# Altium PCB Hydro_Node_PCB.PcbDoc
Units mm, origin at the board's own origin, x right, y up, seen from the top; angles counter-clockwise.
Board outline 80 x 60 mm, 2 copper layers (Top Layer, Bottom Layer); 38 components, 32 nets, 147 pads, 33 vias.
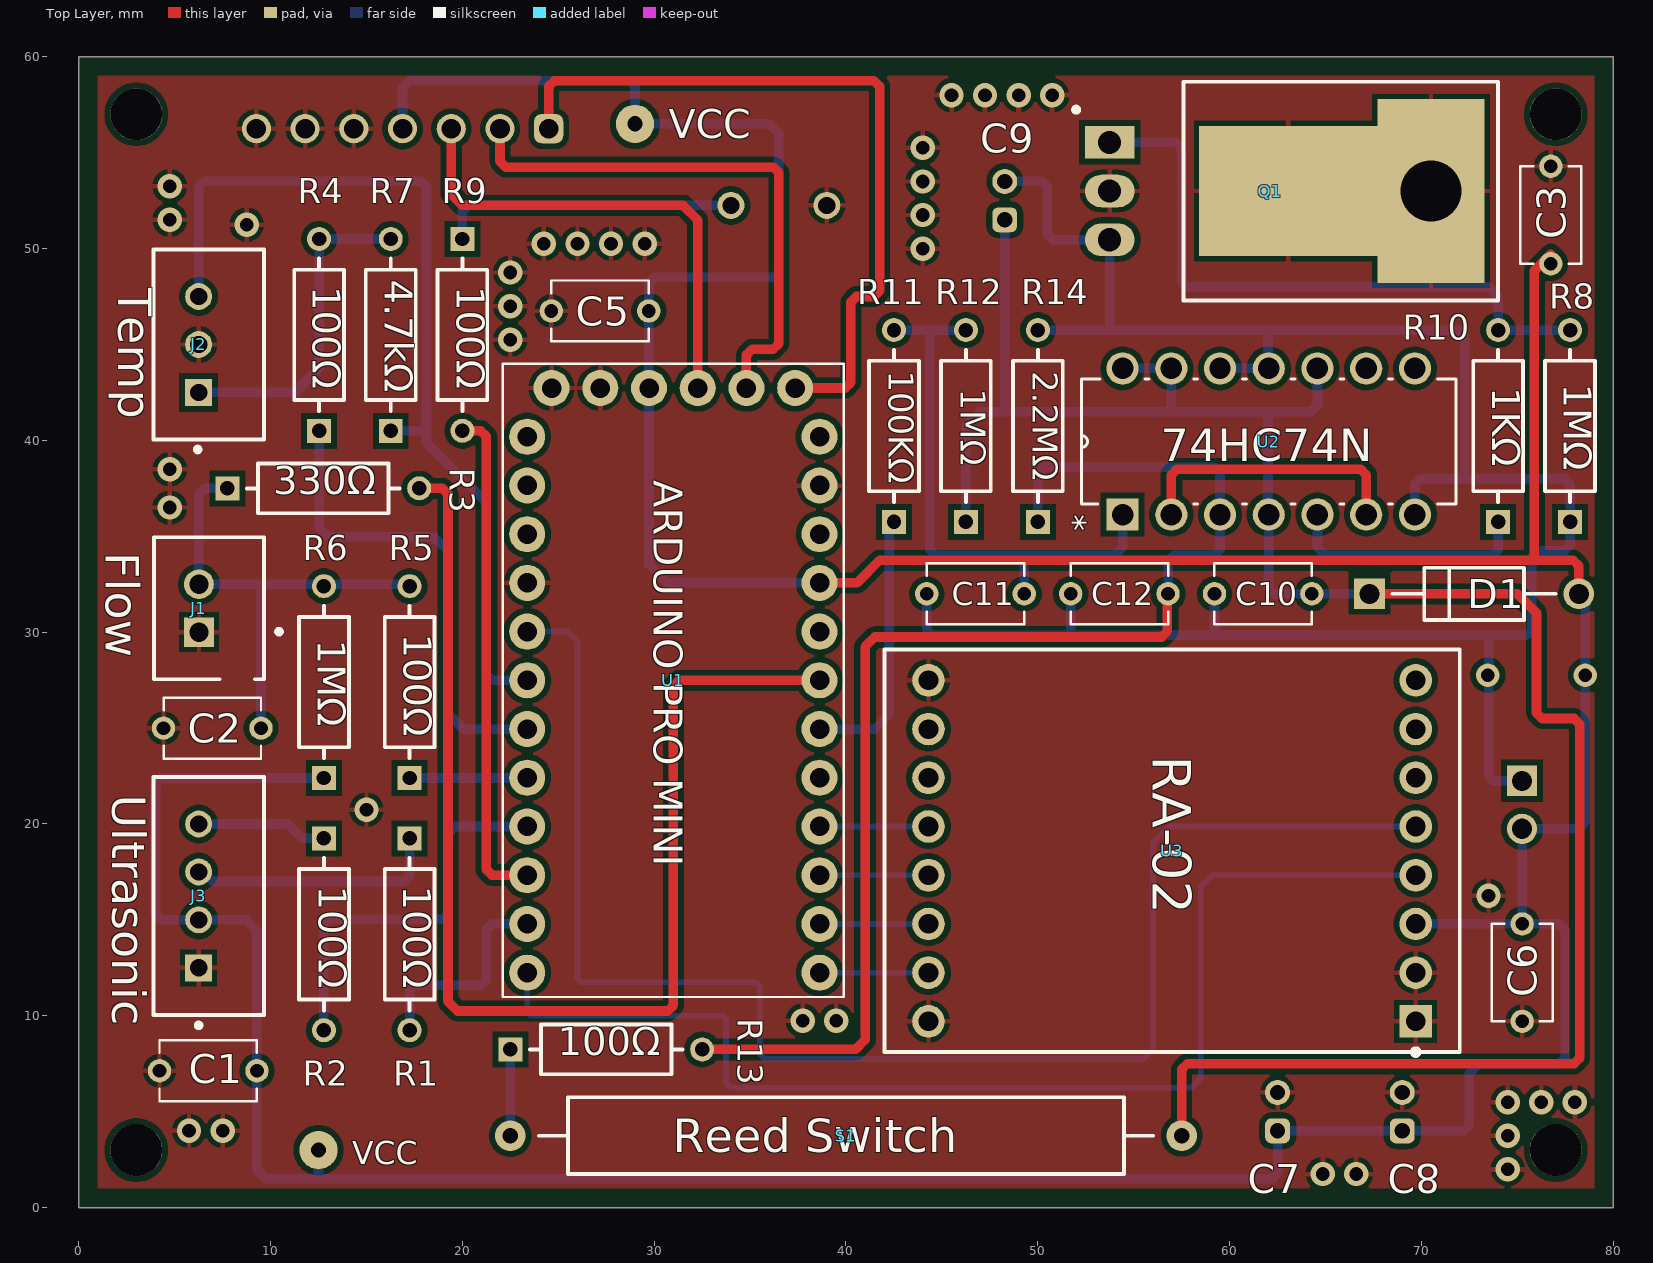
[diagram p0: Top Layer view]
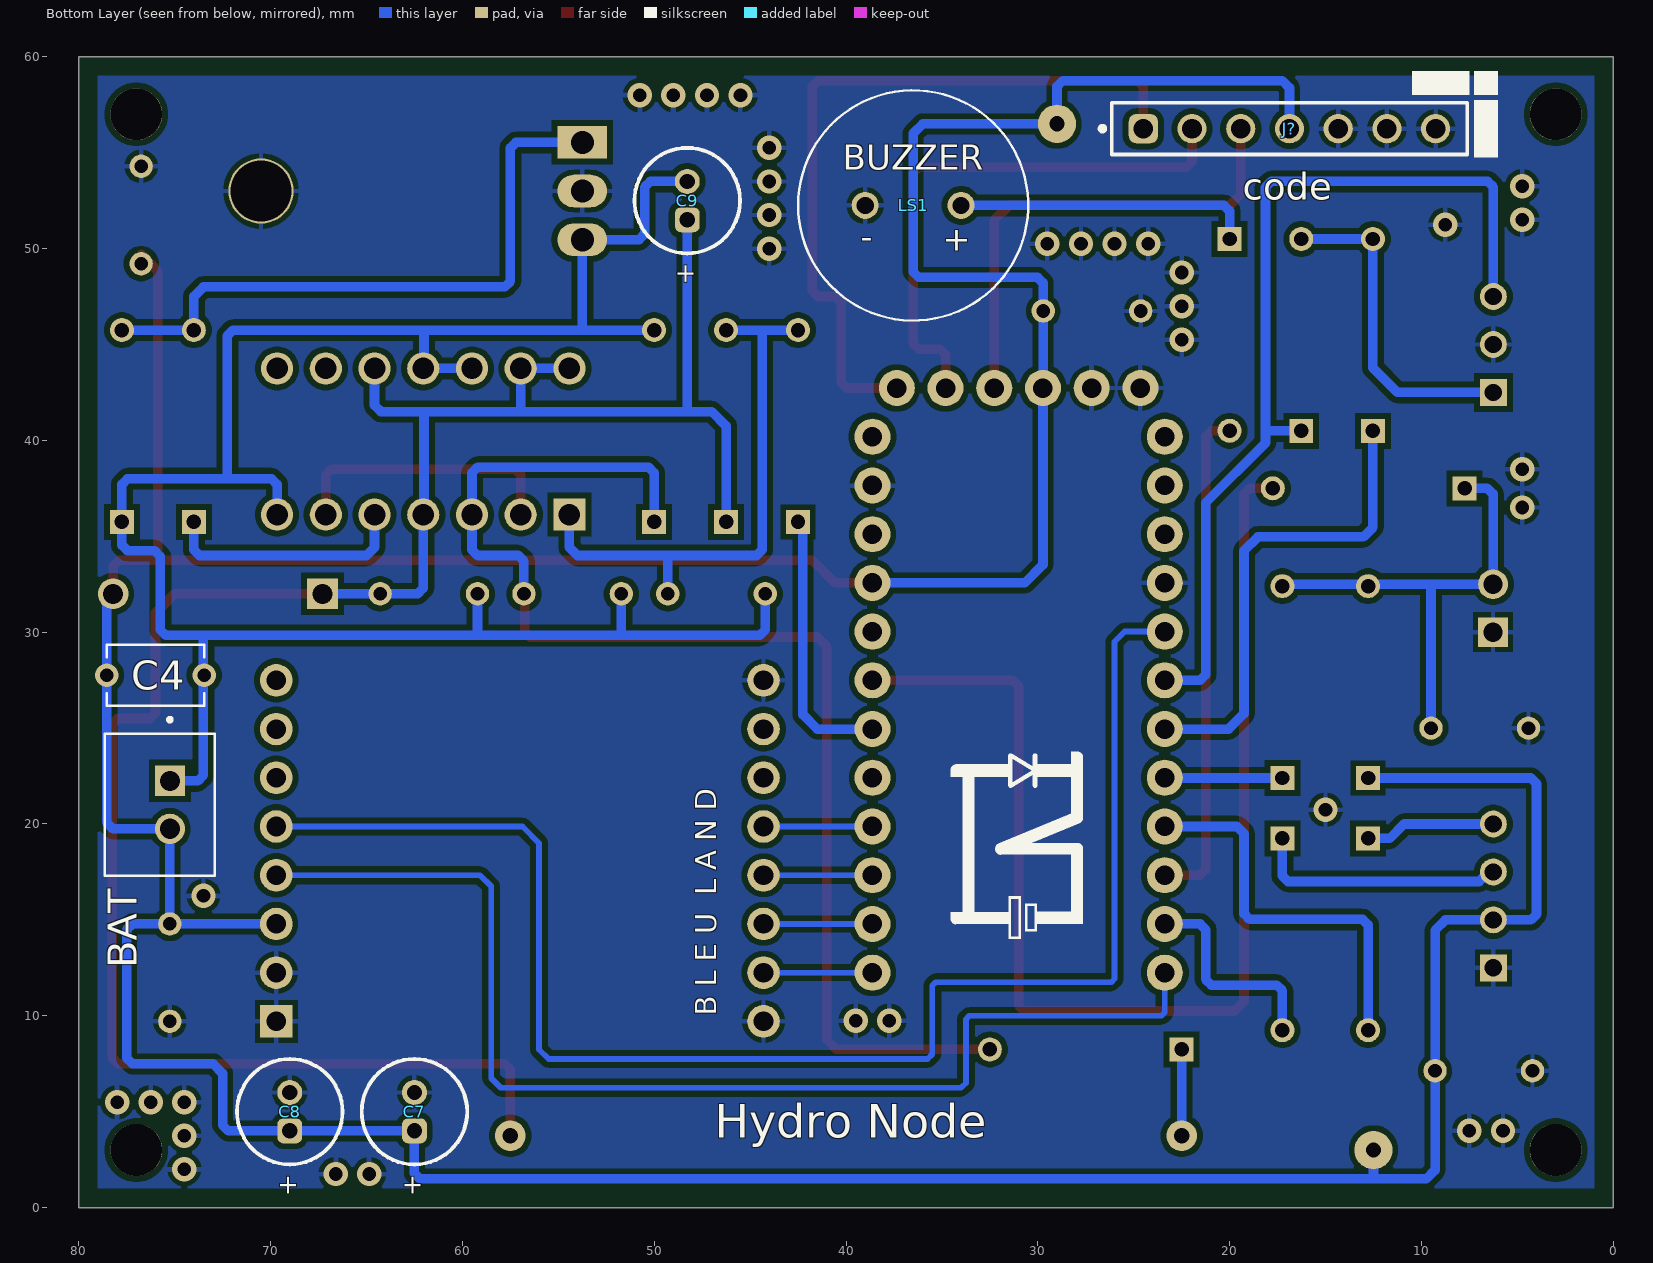
[diagram p1: Bottom Layer view, seen from below]
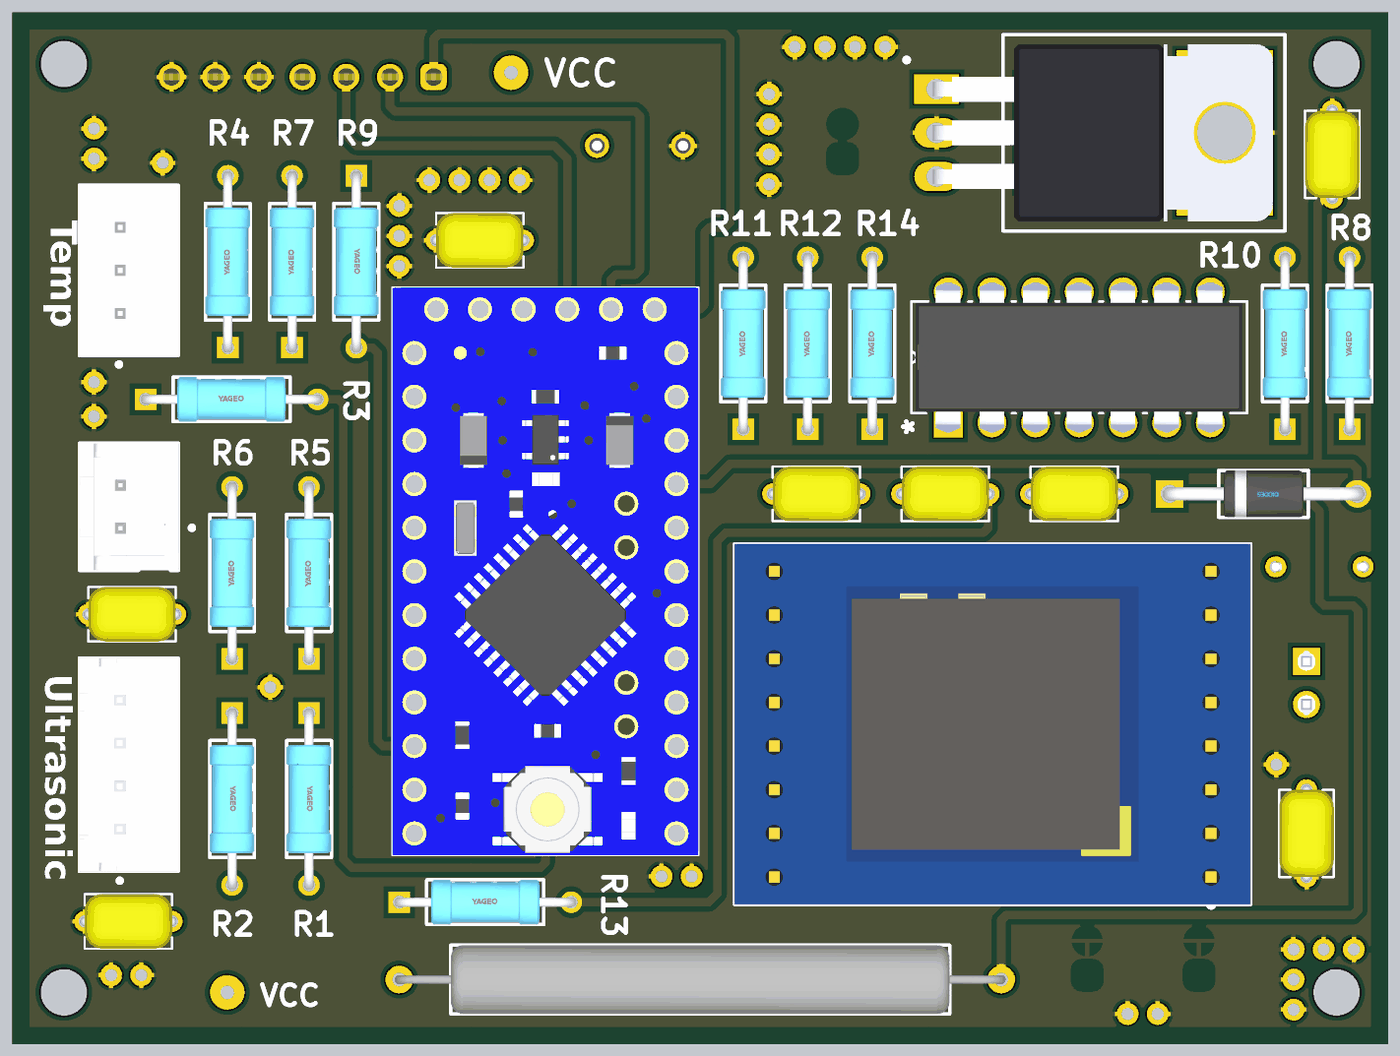
[diagram p2: 3D render of the assembled board from above, using the file's embedded part models]
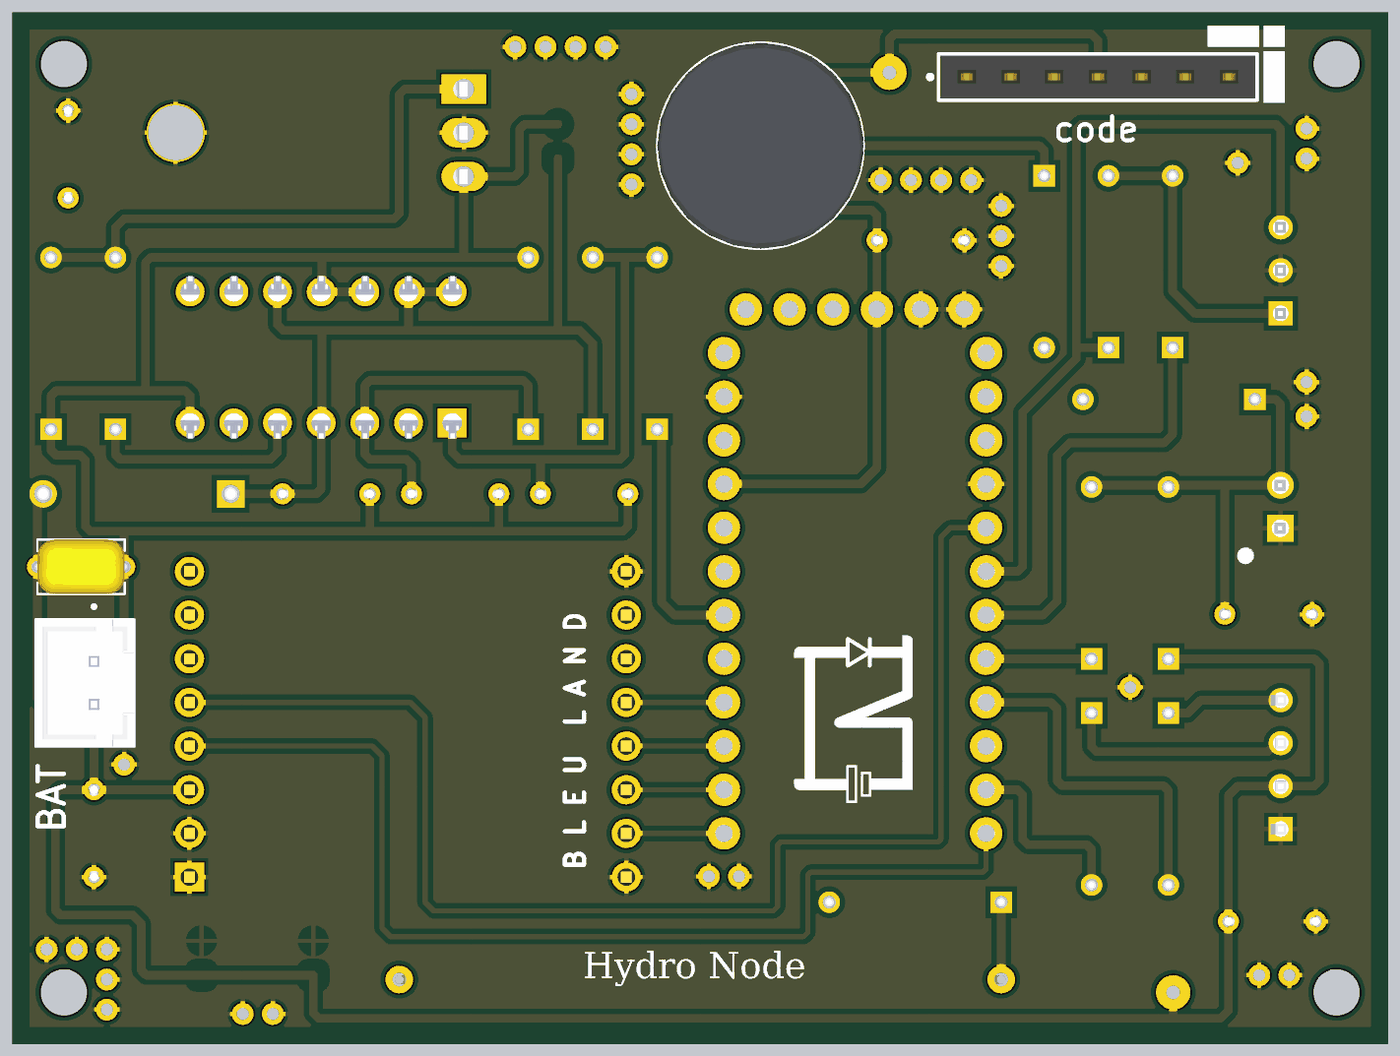
[diagram p3: 3D render of the assembled board from below, using the file's embedded part models]

## Layer stack, top to bottom
Top Solder: solder mask 0.0102, Solder Resist, Dk 3.5
Top Layer: signal copper 0.0356
Dielectric 1: dielectric 0.32, FR-4, Dk 4.8
Bottom Layer: signal copper 0.0356
Bottom Solder: solder mask 0.0102, Solder Resist, Dk 3.5

## Board outline
0,0 0,60 80,60 80,0

## Design rules (kind name [scope] priority, off if disabled: settings)
Clearance [All] p1: gap=0.3 ignorepadtopadclearanceinfootprint=FALSE
HoleSize [All] p1: absolutevalues=TRUE maxlimit=3.5 minlimit=0.025 maxpercent=80.000 minpercent=20.000
PolygonConnect [All] p1: connectstyle=Relief reliefconductorwidth=0.254 reliefentries=4 polygonreliefangle="90 Angle" airgapwidth=0.254
RoutingVias [All] p1: holewidth=0.711 width=1.27 viastyle="Through Hole" minholewidth=0.711 minwidth=1.27 maxholewidth=0.711 maxwidth=1.5
SolderMaskExpansion [All] p1: expansion=0.102 istentingtop=FALSE
Width [All] p1: maxlimit=1 minlimit=0.3 preferedwidth=0.5
29 further rules are at their usual default settings.

## Components (designator, comment, footprint, x,y, rotation, side; value= is the part's Value field where it differs from the comment)
BAT "3.6v" JST_B2B-XH-A_(LF)(SN) 75.775,21 r90 bottom (schematic designator BATT1)
C1 "100nF" CAPRR508W50L508T317H508 6.75,7.133 r180 top
C2 "100nF" CAPRR508W50L508T317H508 6.96,25 r180 top
C3 "100nF" CAPRR508W50L508T317H508 76.75,51.75 r270 top
C4 "100nF" CAPRR508W50L508T317H508 76,27.757 r0 bottom
C5 "100nF" CAPRR508W50L508T317H508 27.18,46.748 r0 top
C6 "100nF" CAPRR508W50L508T317H508 75.25,12.25 r270 top
C7 "100uf" WCAP-ATLL_D5H11 -1207.5,-1265 r270 bottom
C8 "10uf" WCAP-ATLL_D5H11 -1201,-1265 r270 bottom
C9 "10uf" WCAP-ATLL_D5H11 -1221.724,-1217.5 r270 bottom
C10 "100nF" CAPRR508W50L508T317H508 61.75,32 r180 top
C11 "100nF" CAPRR508W50L508T317H508 46.75,32 r180 top
C12 "100nF" CAPRR508W50L508T317H508 54.25,32 r180 top
D1 "1N5819" FP-DO-41_Plastic-MFG 72.75,32 r0 top value="110 pF"
J1 "Flow" FP-B2B-XH-AM_LF_SN-MFG 6.791,31.25 r270 top
J2 "Temp" FP-B3B-XH-A_LF_SN-MFG 6.775,45 r90 top
J3 "Ultrasonic" FP-B4B-XH-A_LF_SN-MFG 6.775,16.25 r270 top
J? "code" 61300711821 16.88,56.25 r180 bottom
LS1 "BUZZER" CUI_CPT-1255C-090 36.5,52.25 r0 bottom
Q1 "IRLZ44N" TO220AB_HORZ_TABDOWN_M3 53.75,53 r270 top
R1 "100Ω" FP-MFR-25-MFG 17.25,14.25 r270 top
R2 "100Ω" FP-MFR-25-MFG 12.781,14.25 r270 top
R3 "330Ω" FP-MFR-25-MFG 12.75,37.5 r0 top
R4 "100Ω" FP-MFR-25-MFG 12.531,45.5 r90 top
R5 "100Ω" FP-MFR-25-MFG 17.25,27.4 r90 top
R6 "1MΩ" FP-MFR-25-MFG 12.781,27.4 r90 top value="1 MΩ"
R7 "4.7kΩ" FP-MFR-25-MFG 16.266,45.5 r90 top value="4.7 kΩ"
R8 "1MΩ" FP-MFR-25-MFG 77.75,40.75 r90 top value="1 MΩ"
R9 "100Ω" FP-MFR-25-MFG 20,45.5 r270 top
R10 "1KΩ" FP-MFR-25-MFG 74,40.75 r90 top value=1kΩ
R11 "100KΩ" FP-MFR-25-MFG 42.5,40.75 r90 top value=100kΩ
R12 "1MΩ" FP-MFR-25-MFG 46.25,40.75 r90 top value="1 MΩ"
R13 "100Ω" FP-MFR-25-MFG 27.5,8.25 r0 top
R14 "2.2MΩ" FP-MFR-25-MFG 50.003,40.75 r90 top
S1 "Reed Switch" REEDSW-THT-D4L29-P35 40,3.75 r0 top value="SPST-NO Reed"
U1 "ARDUINO PRO MINI" MODULE_ARDUINO_PRO_MINI 31,27.49 r0 top
U2 "74HC74N" DIP254P762X420-14 69.66,43.75 r90 top
U3 "RA-02" RA-02_BREAKOUT_THT_2X8 57,18.6 r90 top

## Footprints (in the part's own frame and the unit in brackets; to place one, negate y for a bottom-side part, rotate by r counter-clockwise, add the part's x,y. Pads: shape width x height; smd on the part's side, far side on the other; paste and mask are expansions set on the pad)
61300711821 [mm] "Socket Header, Pitch 2.54 mm, THT, Vertical, single row, 7p"
  rrect50% 1.52x1.52 hole 1.02: 1(-7.62,0)
  round 1.52 hole 1.02: 2(-5.08,0) 3(-2.54,0) 4(0,0) 5(2.54,0) 6(5.08,0) 7(7.62,0)
  silkscreen extent -9.88,-1.35 9.27,1.35, body extent -9.14,-1.25 9.14,1.25, height 8.55
CAPRR508W50L508T317H508 [mm]
  round 1.218 hole 0.71: 1(-2.54,0) 2(2.54,0)
  silkscreen extent -2.54,-1.59 2.54,1.59, body extent -2.79,-1.59 2.79,1.59, height 5.86
CUI_CPT-1255C-090 [mm]
  round 1.408 hole 0.9 mask+0.102: N(2.5,0) P(-2.5,0)
  silkscreen extent -6,-6 6,6, body extent -6,-5.99 6,5.99, height 5.5
DIP254P762X420-14 [mil]
  rect 66x66 / inner round 66 / far side rect 66x66 hole 44 mask+4.02: 1(-300,600)
  round 66 hole 44 mask+4.02: 2(-300,500) 3(-300,400) 4(-300,300) 5(-300,200) 6(-300,100) 7(-300,0) 8(0,0) 9(0,100) 10(0,200) 11(0,300) 12(0,400) 13(0,500) 14(0,600)
  silkscreen extent -278,-84 -22,684, body extent -336,-74 36,675, height 165
FP-B2B-XH-AM_LF_SN-MFG [mm]
  rect 1.55x1.55 hole 1 paste-2539.97 mask+0: 1(1.25,-0.525)
  round 1.55 hole 1 paste-2539.97 mask+0: 2(-1.25,-0.525)
  silkscreen extent -3.7,-2.88 3.7,3.78, body extent -3.8,-2.98 3.8,2.98, height 0.25
FP-B3B-XH-A_LF_SN-MFG [mm]
  rect 1.4x1.4 hole 0.9 paste-2539.97 mask+0: 1(-2.5,0.525)
  round 1.4 hole 0.9 paste-2539.97 mask+0: 2(0,0.525) 3(2.5,0.525)
  silkscreen extent -5.6,-2.88 4.95,2.88, body extent -5.05,-2.98 5.05,2.98, height 0.25
FP-B4B-XH-A_LF_SN-MFG [mm]
  rect 1.4x1.4 hole 0.9 paste-2539.97 mask+0: 1(3.75,-0.525)
  round 1.4 hole 0.9 paste-2539.97 mask+0: 2(1.25,-0.525) 3(-1.25,-0.525) 4(-3.75,-0.525)
  silkscreen extent -6.2,-2.88 6.87,2.88, body extent -6.3,-2.98 6.3,2.98, height 0.25
FP-DO-41_Plastic-MFG [mm]
  rect 1.6x1.6 hole 1.05 paste-2539.97 mask+0: 1(-5.456,0)
  round 1.6 hole 1.05 paste-2539.97 mask+0: 2(5.456,0)
  silkscreen extent -4.26,-1.36 4.26,1.36, body extent -6.36,-1.46 6.36,1.46, height 0.25
FP-MFR-25-MFG [mm]
  rect 1.25x1.25 hole 0.75 paste-2539.97 mask+0: 1(-5,0)
  round 1.25 hole 0.75 paste-2539.97 mask+0: 2(5,0)
  silkscreen extent -3.98,-1.3 3.98,1.3, body extent -5.72,-1.4 5.72,1.4, height 0.25
JST_B2B-XH-A_(LF)(SN) [mm]
  rect 1.575x1.575 / inner round 1.575 / far side rect 1.575x1.575 hole 1.05: 1(1.25,-0.525)
  round 1.575 hole 1.05: 2(-1.25,-0.525)
  silkscreen extent -3.7,-2.88 4.54,2.88, body extent -3.7,-2.88 3.7,2.88, height 7
MODULE_ARDUINO_PRO_MINI [mil]
  round 74 hole 40: JP1_1(250,600) JP1_2(150,600) JP1_3(50,600) JP1_4(-50,600) JP1_5(-150,600) JP1_6(-250,600) JP6_1(300,500) JP6_2(300,400) JP6_3(300,300) JP6_4(300,200) JP6_5(300,100) JP6_6(300,0) JP6_7(300,-100) JP6_8(300,-200) JP6_9(300,-300) JP6_10(300,-400) JP6_11(300,-500) JP6_12(300,-600) JP7_1(-300,-600) JP7_2(-300,-500) JP7_3(-300,-400) JP7_4(-300,-300) JP7_5(-300,-200) JP7_6(-300,-100) JP7_7(-300,0) JP7_8(-300,100) JP7_9(-300,200) JP7_10(-300,300) JP7_11(-300,400) JP7_12(-300,500)
  silkscreen extent -350,-650 350,650, body extent -350,-650 350,650, height 133
RA-02_BREAKOUT_THT_2X8 [mm] "Ai-Thinker Ra-02 LoRa breakout / adapter board, 2 x 8 THT header, 2.54 mm pitch, rows 25.4 mm apart"
  rect 1.7x1.7 hole 1.02: 1(-8.89,-12.7)
  round 1.7 hole 1.02: 2(-6.35,-12.7) 3(-3.81,-12.7) 4(-1.27,-12.7) 5(1.27,-12.7) 6(3.81,-12.7) 7(6.35,-12.7) 8(8.89,-12.7) 9(8.89,12.7) 10(6.35,12.7) 11(3.81,12.7) 12(1.27,12.7) 13(-1.27,12.7) 14(-3.81,12.7) 15(-6.35,12.7) 16(-8.89,12.7)
  silkscreen extent -10.64,-15 10.49,15, body extent -10.49,-15 10.49,15, height 7.3
REEDSW-THT-D4L29-P35 [mm] "Magnetic reed switch, normally open, glass body 4.0 x 29.0 mm, axial leads bent for 35.0 mm through-hole pitch"
  round 1.6 hole 0.8: 1(-17.5,0) 2(17.5,0)
  silkscreen extent -16,-2 16,2, body extent -17.75,-1.99 17.75,1.99, height 4
TO220AB_HORZ_TABDOWN_M3 [mm] "TO-220AB horizontal, tab down on top-side copper, M3 hole, 3x THT leads @2.54mm"
  rect 1.7x2.6 hole 1.2: 1(-2.54,0)
  rect 9.6x5.6 / inner round 3.4 / far side round 3.4 hole 3.2: 2(0,16.75)
  rect 6.8x9.3 smd: 2(0,9.3)
  oval 1.7x2.6 hole 1.2: 2(0,0) 3(2.54,0)
  silkscreen extent -5.7,-1.88 5.7,20.25, body extent -5.16,-0.25 5.16,19.55, height 4.45
WCAP-ATLL_D5H11 [mm] "Aluminum Electrolytic Capacitors, 5x11mm"
  rrect50% 1.3x1.3 hole 0.8: 1(-1269,-1270)
  round 1.3 hole 0.8: 2(-1271,-1270)
  silkscreen extent -1272.75,-1272.75 -1267.25,-1267.25, body extent -1272.49,-1272.5 -1267.5,-1267.5, height 11.31

## Part data
BAT: library part B2B-XH-A_(LF)(SN), "Connector Header Through Hole 2 position 0.098 (2.50mm)", Package=None, Check_prices=https://www.snapeda.com/parts/B2B-XH-A%20(LF)(SN)/JST+Sales+America+Inc./view-part/?ref=eda, MF="JST Sales", MP="B2B-XH-A (LF)(SN)", SnapEDA_Link=https://www.snapeda.com/parts/B2B-XH-A%20(LF)(SN)/JST+Sales+America+Inc./view-part/?ref=snap
C1 C2 C3 C4 C5 C6 C10 C11 C12: library part SR215E104MARTR1., "SR Series 5.08x5.08 mm 100 nF 50 V Â±20% Tol. Z5U Radial Lead/SkyCapÂ®", Package="Radial AVX Interconnect / Elco", Capacitance=100nF, Check_prices=https://www.snapeda.com/parts/SR215E104MARTR1/AVX/view-part/?ref=eda, MF=AVX, MP=SR215E104MARTR1, SnapEDA_Link=https://www.snapeda.com/parts/SR215E104MARTR1/AVX/view-part/?ref=snap
C7: library part CMP-03913-54007379-2, "WCAP-ATLL Aluminum Electrolytic Capacitors", Capacitance=100µF, Case/Package=Radial, Leakage Current=10µA, Max Operating Temperature=105°C, Min Operating Temperature=-55°C, Ripple Current=222mA, Tolerance=20%, Voltage Rating=10V, Diameter=5mm, Height - Seated (Max)=12.4968mm, Impedance=1.02Ω, Lead Pitch=2.0066mm, Length=11mm, Life (Hours)=4000hours, Mount="Through Hole", Packaging="Tape & Box (TB)", Pitch=2mm, Polarity=Polar, RoHS=Compliant
C8 C9: library part CMP-03913-53914479-2, "Alum. Electrolytic Cap 10UF 50V 5MM Radial Wcap-atll, Lifetime 4000H +105OC", Capacitance=10µF, Case/Package=Radial, Leakage Current=5µA, Max Operating Temperature=105°C, Min Operating Temperature=-55°C, Ripple Current=120mA, Tolerance=20%, Voltage Rating=50V, Diameter=5mm, Height=11mm, Height - Seated (Max)=12.4968mm, Impedance=2.6Ω, Lead Pitch=2.0066mm, Length=11mm, Life (Hours)=4000hours, Material=Aluminium, Mount="Through Hole", Packaging="Tape & Box (TB)", Pitch=2mm, Polarity=Polar, REACH SVHC=Unknown, RoHS=Compliant, Voltage Rating (DC)=50V
D1: library part CMP-12790-000042-1, "DIODE SCHOTTKY 40V 1A DO41", Capacitance="110 pF", Forward Current=1A, Manufacturer="Diodes Inc.", Manufacturer Part Number=1N5819-T, Max Junction Temp=+125°C, Max Repetitive Reverse Voltage=40V, Max Surge Forward Current=25A, Package="DO-41 (Plastic)", Peak Reverse Current=1mA, Temperature="-65°C to +125°C", Temperature Range Low=-65°C, Automotive=No, Category=Diode, ComponentLink2Description=Datasheet, ComponentLink2URL=https://www.diodes.com/assets/Datasheets/ds23001.pdf, Device Class L1="Discrete Semiconductors", Device Class L2=Diodes, Device Class L3="Schottky Diodes", Digikey Description="DIODE SCHOTTKY 40V 1A DO41", Footprint Url=https://www.diodes.com/assets/Package-Files/DO-41-Plastic.pdf, Height=2.72mm, Ipc Land Pattern Name=DIOPA1091W105L521D272, Lead Free=Yes, Mouser Description="Schottky Diodes & Rectifiers Vr/40V Io/1A T/R", Octopart=https://octopart.com/1n5819-t-diodes+inc.-55389586, Reverse Voltage=40V, RoHS=TRUE, Temperature Range High=+125°C
J1: library part CMP-17439-000037-1, "CONN HEADER VERT 2POS 2.5MM", Color=Green, Contact Resistance=20mR, Housing Color=White, Max Current Rating=3A, Max Operating Temperature=85°C, Max Voltage Rating (AC)=250V, Min Operating Temperature=-25°C, Connector Type="Male Pin", Contact Material=Brass, Contact Plating=Tin, Contact Type="Male Pin", Depth=5.75mm, Fastening Type=Detent, Housing Material=Polyamide, Lead Free="Lead Free", Length=7.4mm, Mount="Through Hole", Number of Positions=2, Number of Rows=1, Orientation=Straight, Packaging=Bulk, Pitch=2.5mm, Series=XH, Termination=Solder
J2: library part CMP-17439-000014-3, "CONN HEADER VERT 3POS 2.5MM", Color=Natural, Contact Resistance=20mR, Current Rating=3A, Flammability Rating="UL94 V-0", Housing Color=White, Insulation Resistance=1GR, Max Operating Temperature=85°C, Max Voltage Rating (AC)=250V, Min Operating Temperature=-25°C, Connector Type=Header, Contact Finish - Mating=TIN, Contact Material=Brass, Contact Plating=Tin, Contact Shape=Square, Contact Type="Male Pin", Depth=5.75mm, Fastening Type=Detent, Gender=Male, Housing Material=Polyamide, Insulation Color=Natural, Insulation Material=Nylon, Lead Free="Lead Free", Lead Pitch=2.5mm, Length=9.9mm, Max Current Rating=3A, Max Voltage Rating (DC)=250V, Mount="Through Hole", Number of Contacts=3, Number of Positions=3, Number of Rows=1, Orientation=Straight, Packaging=Bulk, Pitch=2.5mm, REACH SVHC="No SVHC", Series=XH, Termination=Solder, Voltage Rating=250V, Voltage Rating (AC)=250V, Wire/Cable Gauge=22AWG
J3: library part CMP-17439-000250-1, "CONN HEADER VERT 4POS 2.5MM", Color=Natural, Contact Resistance=20mR, Current Rating=3A, Flammability Rating="UL94 V-0", Housing Color=White, Insulation Resistance=1GR, Max Operating Temperature=85°C, Max Voltage Rating (AC)=250V, Min Operating Temperature=-25°C, Package Quantity=500, Connector Type=Header, Contact Finish - Mating=TIN, Contact Material=Brass, Contact Plating=Tin, Contact Shape=Square, Contact Type="Male Pin", Depth=5.75mm, Fastening Type=Detent, Gender=Male, Housing Material=Polyamide, Insulation Color=Natural, Insulation Material=Nylon, Lead Free="Lead Free", Lead Pitch=2.5mm, Length=12.4mm, Mated Stacking Heights=9.8mm, Material=Polyamide, Max Current Rating=3A, Max Voltage Rating (DC)=250V, Mount="Through Hole", Number of Contacts=4, Number of Positions=4, Number of Rows=1, Orientation=Straight, Packaging=Bulk, Pitch=2.5mm, REACH SVHC="No SVHC", Series=XH, Termination=Solder, Voltage Rating=250V, Voltage Rating (AC)=250V, Wire/Cable Gauge=22AWG
J?: library part CMP-1502-01326-4, "Btb Conn, Rcpt, 7Pos, 1Row, 2.54Mm Rohs Compliant: Yes", Contact Resistance=20mΩ, Current Rating=3A, Operating Supply Voltage=250V, Gender=Female, Lead Pitch=2.54mm, Number of Pins=7, Orientation=Vertical, RoHS=Non-Compliant
LS1: library part CPT-1255C-090, "12 mm, 20 Vp-p, 80 dB, Through Hole, Piezo Audio Transducer Buzzer", Package=None, Check_prices=https://www.snapeda.com/parts/CPT-1255C-090/Same+Sky/view-part/?ref=eda, MF="Same Sky", MP=CPT-1255C-090, SnapEDA_Link=https://www.snapeda.com/parts/CPT-1255C-090/Same+Sky/view-part/?ref=snap
Q1: "N-Channel Logic-Level HEXFET Power MOSFET, 55V, 47A, Rds(on) 22mOhm @ Vgs=5V, TO-220AB", Manufacturer="Infineon Technologies (Intl. Rectifier)", Manufacturer Part Number=IRLZ44NPBF, Package=TO-220AB, HelpURL=https://www.infineon.com/part/IRLZ44N, Id="47 A", Mounting="Horizontal, tab down, M3 screw", Rds(on)="22 mOhm @ Vgs = 5 V", Tab="Tab is Drain metal - netless copper in the footprint", Vdss="55 V", Vgs(th)="1.0 V ... 2.0 V (logic level)"
R1 R2 R4 R5 R9 R13: library part CMP-03413-000001-1, "RES 100 OHM 1/4W 1% AXIAL", Manufacturer=Yageo, Manufacturer Part Number=MFR-25FBF52-100R, Package=MFR-25, Power Rating=0.25W, Temperature="-55°C to +155°C", Temperature Coefficient=100ppm/°C, Temperature Range High=+155°C, Temperature Range Low=-55°C, Tolerance=1%, Voltage Rating=250V, Automotive=No, Category=Res, ComponentLink2Description=Datasheet, ComponentLink2URL=https://www.yageo.com/upload/media/product/products/datasheet/lr/Yageo_LR_MFR_1.pdf, Composition="Metal Film", Device Class L1="Passive Components", Device Class L2=Resistors, Device Class L3="Through-Hole Resistors", Digikey Description="RES 1.18K OHM 1/4W 1% AXIAL", Height=2.6mm, Ipc Land Pattern Name=RESAD1000W75L680D260, Lead Free=Yes, Mouser Description="Metal Film Resistors 1.18K OHM 1/4W 1%", Octopart=https://octopart.com/mfr-25fbf52-1k18-yageo-56251681, Resistance=100Ω, RoHS=TRUE, Series=MFR
R3: library part CMP-03413-000001-1, "RES 330 OHM 1/4W 1% AXIAL", Manufacturer=Yageo, Manufacturer Part Number=MFR-25FBF52-330R, Package=MFR-25, Power Rating=0.25W, Temperature="-55°C to +155°C", Temperature Coefficient=100ppm/°C, Temperature Range High=+155°C, Temperature Range Low=-55°C, Tolerance=1%, Voltage Rating=250V, Automotive=No, Category=Res, ComponentLink2Description=Datasheet, ComponentLink2URL=https://www.yageo.com/upload/media/product/products/datasheet/lr/Yageo_LR_MFR_1.pdf, Composition="Metal Film", Device Class L1="Passive Components", Device Class L2=Resistors, Device Class L3="Through-Hole Resistors", Digikey Description="RES 1.18K OHM 1/4W 1% AXIAL", Height=2.6mm, Ipc Land Pattern Name=RESAD1000W75L680D260, Lead Free=Yes, Mouser Description="Metal Film Resistors 1.18K OHM 1/4W 1%", Octopart=https://octopart.com/mfr-25fbf52-1k18-yageo-56251681, Resistance=330Ω, RoHS=TRUE, Series=MFR
R6: library part CMP-03413-000001-1, "RES 1MΩ 1/4W 1% AXIAL", Manufacturer=Yageo, Manufacturer Part Number=MFR-25FBF52-1MΩ, Package=MFR-25, Power Rating=0.25W, Resistance="1 MΩ", Temperature="-55°C to +155°C", Temperature Coefficient=100ppm/°C, Temperature Range High=+155°C, Temperature Range Low=-55°C, Tolerance=1%, Voltage Rating=250V, Automotive=No, Category=Res, ComponentLink2Description=Datasheet, ComponentLink2URL=https://www.yageo.com/upload/media/product/products/datasheet/lr/Yageo_LR_MFR_1.pdf, Composition="Metal Film", Device Class L1="Passive Components", Device Class L2=Resistors, Device Class L3="Through-Hole Resistors", Digikey Description="RES 1.18K OHM 1/4W 1% AXIAL", Height=2.6mm, Ipc Land Pattern Name=RESAD1000W75L680D260, Lead Free=Yes, Mouser Description="Metal Film Resistors 1.18K OHM 1/4W 1%", Octopart=https://octopart.com/mfr-25fbf52-1k18-yageo-56251681, RoHS=TRUE, Series=MFR
R7: library part CMP-03413-000001-1, "RES 4.7k 1/4W 1% AXIAL", Manufacturer=Yageo, Manufacturer Part Number=MFR-25FBF52-4K7, Package=MFR-25, Power Rating=0.25W, Resistance="4.7 kΩ", Temperature="-55°C to +155°C", Temperature Coefficient=100ppm/°C, Temperature Range High=+155°C, Temperature Range Low=-55°C, Tolerance=1%, Voltage Rating=250V, Automotive=No, Category=Res, ComponentLink2Description=Datasheet, ComponentLink2URL=https://www.yageo.com/upload/media/product/products/datasheet/lr/Yageo_LR_MFR_1.pdf, Composition="Metal Film", Device Class L1="Passive Components", Device Class L2=Resistors, Device Class L3="Through-Hole Resistors", Digikey Description="RES 1.18K OHM 1/4W 1% AXIAL", Height=2.6mm, Ipc Land Pattern Name=RESAD1000W75L680D260, Lead Free=Yes, Mouser Description="Metal Film Resistors 1.18K OHM 1/4W 1%", Octopart=https://octopart.com/mfr-25fbf52-1k18-yageo-56251681, RoHS=TRUE, Series=MFR
R8 R12: library part CMP-03413-000001-1, "RES 1M OHM 1/4W 1% AXIAL", Manufacturer=Yageo, Manufacturer Part Number=MFR-25FBF52-1MΩ, Package=MFR-25, Power Rating=0.25W, Resistance="1 MΩ", Temperature="-55°C to +155°C", Temperature Coefficient=100ppm/°C, Temperature Range High=+155°C, Temperature Range Low=-55°C, Tolerance=1%, Voltage Rating=250V, Automotive=No, Category=Res, ComponentLink2Description=Datasheet, ComponentLink2URL=https://www.yageo.com/upload/media/product/products/datasheet/lr/Yageo_LR_MFR_1.pdf, Composition="Metal Film", Device Class L1="Passive Components", Device Class L2=Resistors, Device Class L3="Through-Hole Resistors", Height=2.6mm, Ipc Land Pattern Name=RESAD1000W75L680D260, Lead Free=Yes, Octopart=https://octopart.com/mfr-25fbf52-1k18-yageo-56251681, RoHS=TRUE, Series=MFR
  R8: Digikey Description="RES 1.18K OHM 1/4W 1% AXIAL", Mouser Description="Metal Film Resistors 1.18K OHM 1/4W 1%"
  R12: Digikey Description="RES 1M OHM 1/4W 1% AXIAL", Mouser Description="Metal Film Resistors 1M OHM 1/4W 1%"
R10: library part CMP-03413-000001-1, "RES 1K OHM 1/4W 1% AXIAL", Manufacturer=Yageo, Manufacturer Part Number=MFR-25FBF52-1K, Package=MFR-25, Power Rating=0.25W, Resistance=1kΩ, Temperature="-55°C to +155°C", Temperature Coefficient=100ppm/°C, Temperature Range High=+155°C, Temperature Range Low=-55°C, Tolerance=1%, Voltage Rating=250V, Automotive=No, Category=Res, ComponentLink2Description=Datasheet, ComponentLink2URL=https://www.yageo.com/upload/media/product/products/datasheet/lr/Yageo_LR_MFR_1.pdf, Composition="Metal Film", Device Class L1="Passive Components", Device Class L2=Resistors, Device Class L3="Through-Hole Resistors", Digikey Description="RES 1.18K OHM 1/4W 1% AXIAL", Height=2.6mm, Ipc Land Pattern Name=RESAD1000W75L680D260, Lead Free=Yes, Mouser Description="Metal Film Resistors 1.18K OHM 1/4W 1%", Octopart=https://octopart.com/mfr-25fbf52-1k18-yageo-56251681, RoHS=TRUE, Series=MFR
R11: library part CMP-03413-000001-1, "RES 100K OHM 1/4W 1% AXIAL", Manufacturer=Yageo, Manufacturer Part Number=MFR-25FBF52-100K, Package=MFR-25, Power Rating=0.25W, Resistance=100kΩ, Temperature="-55°C to +155°C", Temperature Coefficient=100ppm/°C, Temperature Range High=+155°C, Temperature Range Low=-55°C, Tolerance=1%, Voltage Rating=250V, Automotive=No, Category=Res, ComponentLink2Description=Datasheet, ComponentLink2URL=https://www.yageo.com/upload/media/product/products/datasheet/lr/Yageo_LR_MFR_1.pdf, Composition="Metal Film", Device Class L1="Passive Components", Device Class L2=Resistors, Device Class L3="Through-Hole Resistors", Digikey Description="RES 100K OHM 1/4W 1% AXIAL", Height=2.6mm, Ipc Land Pattern Name=RESAD1000W75L680D260, Lead Free=Yes, Mouser Description="Metal Film Resistors 100K OHM 1/4W 1%", Octopart=https://octopart.com/mfr-25fbf52-1k18-yageo-56251681, RoHS=TRUE, Series=MFR
R14: library part CMP-03413-000001-1, "RES 2.2M OHM 1/4W 1% AXIAL", Manufacturer=Yageo, Manufacturer Part Number=MFR-25FBF52-2.2M, Package=MFR-25, Power Rating=0.25W, Temperature="-55°C to +155°C", Temperature Coefficient=100ppm/°C, Temperature Range High=+155°C, Temperature Range Low=-55°C, Tolerance=1%, Voltage Rating=250V, Automotive=No, Category=Res, ComponentLink2Description=Datasheet, ComponentLink2URL=https://www.yageo.com/upload/media/product/products/datasheet/lr/Yageo_LR_MFR_1.pdf, Composition="Metal Film", Device Class L1="Passive Components", Device Class L2=Resistors, Device Class L3="Through-Hole Resistors", Digikey Description="RES 2.2M OHM 1/4W 1% AXIAL", Height=2.6mm, Ipc Land Pattern Name=RESAD1000W75L680D260, Lead Free=Yes, Mouser Description="Metal Film Resistors 2.2M OHM 1/4W 1%", Octopart=https://octopart.com/mfr-25fbf52-1k18-yageo-56251681, Resistance=2.2MΩ, RoHS=TRUE, Series=MFR
S1: library part REED-SWITCH-NO-D4L29, "Magnetic reed switch, normally open, glass body 4.0 x 29.0 mm, axial leads bent for 35.0 mm through-hole pitch", Contact Rating="TBD - see datasheet", Manufacturer=Littelfuse, Manufacturer Part Number=MDSM-4R-12-18, Package=MDSM-4, Temperature="-40°C to +125°C", Temperature Range High=+125°C, Temperature Range Low=-40°C, Automotive=No, Body Size="4.0 x 29.0 mm glass", Category=Switch, ComponentLink2Description=Datasheet, ComponentLink2URL=https://www.littelfuse.com/~/media/electronics/datasheets/reed_switches/littelfuse_reed_switches_mdsm_4_datasheet.pdf.pdf, Device Class L1=Electromechanical, Device Class L2=Switches, Device Class L3=unset, Digikey Description="SWITCH REED SPST-NO 350MA 140V", Height=2.84mm, Lead Free=Yes, Lead Pitch="35.0 mm", Mouser Description="Magnetic / Reed Switches MDSM-4R 5277 12-18", Octopart=https://octopart.com/mdsm-4r-12-18-littelfuse-55632078, Pull-In Sensitivity="TBD AT", RoHS=TRUE, Standoff Height=0mm
U1: library part ARDUINO_PRO_MINI, "This board was developed for applications and installations where space is premium and projects are made as permanent set ups. Small, available in 3.3 V and 5 V versions, powered by ATmega328P.", Package=None, Check_prices=https://www.snapeda.com/parts/Arduino%20Pro%20Mini/Arduino/view-part/?ref=eda, MF=Arduino, MP="Arduino Pro Mini", SnapEDA_Link=https://www.snapeda.com/parts/Arduino%20Pro%20Mini/Arduino/view-part/?ref=snap
U2: library part 74HC74N,652, "Flip Flop 2 Element D-Type 1 Bit Positive Edge 14-DIP (0.300, 7.62mm)", Package=None, Check_prices=https://www.snapeda.com/parts/74HC74N,652/Nexperia/view-part/?ref=eda, MF=Nexperia, MP=74HC74N,652, SnapEDA_Link=https://www.snapeda.com/parts/74HC74N,652/Nexperia/view-part/?ref=snap
U3: library part Ra-02, "Ai-Thinker Ra-02 LoRa transceiver module, SX1278, 410-525 MHz, +18 dBm, SPI, IPEX antenna, SMD-16", Frequency="410-525 MHz", LCSC=C90039, Manufacturer=Ai-Thinker, Manufacturer Part Number=Ra-02

## Free pads (board coordinates)
  round 2.7 hole 2.7 unplated: 5(3,3) 5(3,57) 5(77,3) 5(77,57)
  round 2 hole 0.8: 6(12.5,3) 6(29,56.5)

## Via types
v1: diameter 1.27, hole 0.711, Top Layer to Bottom Layer, 33 vias

## Nets (pads, with @x,y where several pads share a name; then routed paths per layer and width w, separated by ;. In a path a pad name is that pad's centre, name@x,y a point inside that pad or via, vN(x,y) a via of type N, cw(c..) or ccw(c..) an arc to the next point about the centre after c; other vN are vias at no path point)
BATT+: BAT.2 C1.1 C3.2 C4.2 C5.2 C6.1 C7.1 C8.1 D1.2 J3.2 J?.4 pad.6 R6.1 U1.JP1_4 U1.JP6_4 U3.3 | length 264.7
  Top Layer w0.5: U1.JP6_4 40.57,32.57 41.75,33.75 75.89,33.75 ; C3.2@76.75,49.71 75.89,48.85 75.89,33.75 ; D1.2 78.206,33.457 77.913,33.75 75.89,33.75
  Bottom Layer w0.5: pad.6@12.5,3 12.5,1.5 ; R6.1 4.293,22.4 4,22.107 4,15.293 4.293,15 J3.2 8.75,15 9.29,14.46 C1.1 9.29,1.96 9.75,1.5 12.5,1.5 ; J?.4 16.88,58.38 17.25,58.75 28.707,58.75 29,58.457 29,56.5 36,56.5 36.5,56 36.5,48.793 36.207,48.5 30.013,48.5 29.72,48.207 C5.2 U1.JP1_4@29.72,42.74 ; U1.JP1_4 29.73,33.52 30.68,32.57 U1.JP6_4 ; U3.3 C6.1 ; D1.2 78.206,31.702 78.54,31.369 C4.2 78.54,20.083 78.207,19.75 BAT.2 C6.1 ; 12.5,1.5 62.207,1.5 62.5,1.793 C7.1 C8.1 72.207,4 72.5,4.293 72.5,7 73,7.5 77.207,7.5 77.5,7.793 77.5,14.497 77.207,14.79 C6.1
BATT-: BAT.1 C4.1 C9.2 C10.2 C11.2 C12.2 Q1.3 R8.1 R14.2 U2.7 U2.11 U2.12 | length 113.6
  Bottom Layer w0.5: C11.2 44.21,30.123 44.503,29.83 51.71,29.83 ; C9.2 50.207,53.5 50.5,53.207 50.5,50.753 50.793,50.46 Q1.3 53.75,45.75 ; R14.2 53.75,45.75 ; C12.2 51.71,29.83 ; C10.2 59.21,29.83 ; U2.12 U2.11 62,43.79 62,45.75 ; U2.7 69.66,37.707 69.953,38 72.25,38 ; C4.1 73.5,27.797 73.5,29.83 ; C4.1@73.5,27.757 73.5,22.543 73.793,22.25 BAT.1@75.225,22.25 ; 51.71,29.83 59.21,29.83 ; 53.75,45.75 62,45.75 ; 59.21,29.83 73.5,29.83 ; 62,45.75 71.957,45.75 72.25,45.457 72.25,38 ; 72.25,38 77.457,38 77.75,37.707 R8.1 77.75,34.543 77.457,34.25 76.043,34.25 75.75,33.957 75.75,30.123 75.457,29.83 73.5,29.83
GND: C1.2 C2.2 C3.1 C5.1 C6.2 C7.2 C8.2 J1.1 J2.2 J3.1 J?.5 J?.6 J?.7 LS1.N Q1.2 U1.JP1_5 U1.JP1_6 U1.JP6_2 U1.JP7_9 U3.1 U3.2 U3.9 U3.16
  other v1: 64.85,1.75 66.6,1.75 74.5,2 74.5,3.75 5.75,4 7.5,4 74.5,5.5 76.25,5.5 78,5.5 37.75,9.75 39.5,9.75 73.5,16.25 15,20.75 4.75,36.5 4.75,38.5 22.5,45.25 22.5,47 22.5,48.75 44,50 24.25,50.25 26,50.25 27.75,50.25 29.5,50.25 8.75,51.25 4.75,51.5 44,51.75 4.75,53.25 44,53.5 44,55.25 45.5,58 47.25,58 49,58 50.75,58
NetC2_1: C2.1 J1.2 R3.1 R5.2 R6.2 | length 24.9
  Bottom Layer w0.5: R3.1 6.559,37.5 6.266,37.207 J1.2 9.5,32.5 ; C2.1 9.5,32.5 ; R5.2@17.4,32.5 9.5,32.5
NetC9_1: C9.1 C10.1 D1.1 R12.1 S1.2 U2.4 U2.10 U2.13 U2.14 | length 113.8
  Top Layer w0.5: S1.2 57.5,7.207 57.793,7.5 77.957,7.5 78.25,7.793 78.25,25.207 77.957,25.5 76.293,25.5 76,25.793 76,31 75,32 D1.1
  Bottom Layer w0.5: R12.1 46.25,40.75 47,41.5 48.276,41.5 ; C9.1 48.276,41.5 ; U2.14 U2.13 56.96,41.5 ; U2.10 64.58,41.83 64.25,41.5 62,41.5 ; D1.1 C10.1 62.333,32 62.04,32.293 U2.4 62,36.17 62,41.5 ; 48.276,41.5 56.96,41.5 ; 56.96,41.5 62,41.5
NetC11_1: C11.1 R11.2 R12.2 U2.1 | length 29.3
  Bottom Layer w0.5: R11.2 44.375,45.75 ; R12.2 44.375,45.75 ; C11.1 49.29,34 ; U2.1 54.42,34.42 54,34 49.29,34 ; 44.375,45.75 44.375,34.293 44.668,34 49.29,34
NetC12_1: C12.1 R13.2 R14.1 U2.3 | length 68.2
  Top Layer w0.5: R13.2 40.5,8.25 41,8.75 41,29.25 41.5,29.75 56.457,29.75 56.75,30.043 56.75,31.96 C12.1
  Bottom Layer w0.5: R14.1 50.003,38.311 50.296,38.604 59.207,38.604 59.5,38.311 U2.3 59.5,34.293 59.207,34 57.083,34 56.79,33.707 C12.1
NetJ2_1: J2.1 R4.2 R7.2 | length 17.3
  Bottom Layer w0.5: J2.1 11.25,42.5 12.531,43.781 R4.2 R7.2
NetJ2_3: J2.3 R7.1 U1.JP7_7 | length 48.7
  Bottom Layer w0.5: J2.3 6.25,53.207 6.543,53.5 17.836,53.5 18.129,53.207 18.129,40.5 ; R7.1 18.129,40.5 ; U1.JP7_7 21.543,27.49 21.25,27.783 21.25,36.75 18.129,39.871 18.129,40.5
NetJ3_3: J3.3 R1.1 | length 13.3
  Bottom Layer w0.5: J3.3 6.493,17.5 6.993,17 16.957,17 17.25,17.293 R1.1
NetJ3_4: J3.4 R2.1 | length 6.8
  Bottom Layer w0.5: J3.4 10.9,20 11.65,19.25 R2.1
NetJ?_1: J?.1 U1.JP1_1 | length 39.3
  Top Layer w0.5: J?.1 24.5,58.457 24.793,58.75 41.457,58.75 41.75,58.457 41.75,47.793 41.457,47.5 40.547,47.5 40.254,47.207 40.254,43.027 39.957,42.73 U1.JP1_1
NetJ?_2: J?.2 U1.JP1_2 | length 29.1
  Top Layer w0.5: J?.2 21.96,54.543 22.253,54.25 36.207,54.25 36.5,53.957 36.5,45.043 36.207,44.75 35.103,44.75 34.81,44.457 U1.JP1_2
NetJ?_3: J?.3 U1.JP1_3 | length 25.6
  Top Layer w0.5: J?.3 19.42,52.83 20,52.25 31.5,52.25 32.27,51.48 U1.JP1_3
NetLS1_P: LS1.P R9.1 | length 15.6
  Bottom Layer w0.5: R9.1 20,51.957 20.293,52.25 LS1.P
NetQ1_1: Q1.1 R8.2 R10.2 | length 33.2
  Bottom Layer w0.5: Q1.1 57.207,55.54 57.5,55.247 57.5,48.293 57.793,48 73.5,48 74,47.5 R10.2 R8.2
NetR1_2: R1.2 U1.JP7_2 | length 11.2
  Bottom Layer w0.5: R1.2 17.25,11.31 17.543,11.603 20.957,11.603 21.25,11.896 21.25,14.497 21.543,14.79 U1.JP7_2
NetR2_2: R2.2 U1.JP7_4 | length 20.7
  Bottom Layer w0.5: R2.2 12.781,14.738 13.074,15.031 18.957,15.031 19.25,15.324 19.25,19.5 19.62,19.87 U1.JP7_4
NetR3_2: R3.2 U1.JP6_6 | length 64.6
  Top Layer w0.5: R3.2 18.957,37.5 19.25,37.207 19.25,10.75 19.75,10.25 30.707,10.25 31,10.543 31,27.197 31.293,27.49 U1.JP6_6
NetR4_1: R4.1 U1.JP7_6 | length 25.2
  Bottom Layer w0.5: R4.1 12.531,35.469 13.031,34.969 18.531,34.969 19.25,34.25 19.25,25.75 20.05,24.95 U1.JP7_6
NetR5_1: R5.1 U1.JP7_5 | length 6.1
  Bottom Layer w0.5: R5.1 U1.JP7_5@23.37,22.4
NetR9_2: R9.2 U1.JP7_3 | length 26.2
  Top Layer w0.5: R9.2 20.957,40.5 21.25,40.207 21.25,17.623 21.543,17.33 U1.JP7_3
NetR10_1: R10.1 U2.5 | length 12.9
  Bottom Layer w0.5: U2.5 64.58,34.42 65,34 73.707,34 74,34.293 R10.1
NetR11_1: R11.1 U1.JP6_7 | length 14.1
  Bottom Layer w0.5: U1.JP6_7 41.5,24.95 42.25,25.7 42.25,35.5 R11.1
NetR13_1: R13.1 S1.1 | length 4.5
  Bottom Layer w0.5: S1.1 R13.1
NetU1_JP6_9: U1.JP6_9 U3.12 | length 5.7
  Bottom Layer w0.3: U1.JP6_9 U3.12
NetU1_JP6_10: U1.JP6_10 U3.13 | length 5.7
  Bottom Layer w0.3: U1.JP6_10 U3.13
NetU1_JP6_11: U1.JP6_11 U3.14 | length 5.7
  Bottom Layer w0.3: U1.JP6_11 U3.14
NetU1_JP6_12: U1.JP6_12 U3.15 | length 5.7
  Bottom Layer w0.3: U1.JP6_12 U3.15
NetU1_JP7_1: U1.JP7_1 U3.4 | length 62.4
  Bottom Layer w0.3: U1.JP7_1 23.38,10.176 23.556,10 33.574,10 33.75,9.824 33.75,6.5 34,6.25 58,6.25 58.5,6.75 58.5,16.75 59.08,17.33 U3.4
NetU1_JP7_8: U1.JP7_8 U3.5 | length 79.3
  Bottom Layer w0.3: U1.JP7_8 25.47,30.03 26,29.5 26,11.926 26.176,11.75 35.324,11.75 35.5,11.574 35.5,8 35.75,7.75 55.5,7.75 56,8.25 56,19 56.87,19.87 U3.5
NetU2_2: U2.2 U2.6 | length 14.6
  Top Layer w0.5: U2.2 56.96,38.207 57.253,38.5 66.827,38.5 67.12,38.207 U2.6
pads on no net: U1.JP6_1 U1.JP6_3 U1.JP6_5 U1.JP6_8 U1.JP7_10 U1.JP7_11 U1.JP7_12 U2.8 U2.9 U3.6 U3.7 U3.8 U3.10 U3.11

## Polygon pours and split planes (outlines as drawn)
GND on Bottom Layer "NONET_L02_P-001" (solid, remove dead copper, pour order 0): 1,59 79,59 79,1 1,1
GND on Top Layer "NONET_L02_P-001" (solid, remove dead copper, pour order 1): 1,59 79,59 79,1 1,1

## Silkscreen, mask and mechanical layers (free items; w line width, h text height)
Top Overlay:
  text "VCC" at 30.754,55.754 h1.5
  text "VCC" at 14.254,2.254 h1.2
Bottom Overlay:
  drawing of 4 lines, arcs and shapes, not listed
  text "B L E U  L A N D" at 46.754,10.004 h1.1 r270
  text "Hydro Node" at 46.833,3.076 h3

## Text inside footprints (layer, text, board x,y; h text height)
C7: Bottom Overlay "+" at 63,1.727 h1 r90
C8: Bottom Overlay "+" at 69.5,1.75 h1 r90
C9: Bottom Overlay "+" at 48.776,49.25 h1 r90
LS1: Bottom Overlay "+" at 33.5,50.95 h1.27 r180; Bottom Overlay "-" at 38.6,50.95 h1.27 r180
U2: Top Overlay "*" at 53.08,35.25 h1.27 r90; Mechanical 13 "*" at 53.08,35.25 h1.27 r90